# Altium PCB SFCmasterD.PcbDoc (part 2 of 7)
Units mm, origin at the board's own origin, x right, y up, seen from the top; angles counter-clockwise.
Board outline 152.4 x 101.6 mm, 2 copper layers (Top Layer, Bottom Layer); 249 components, 250 nets, 987 pads, 265 vias.
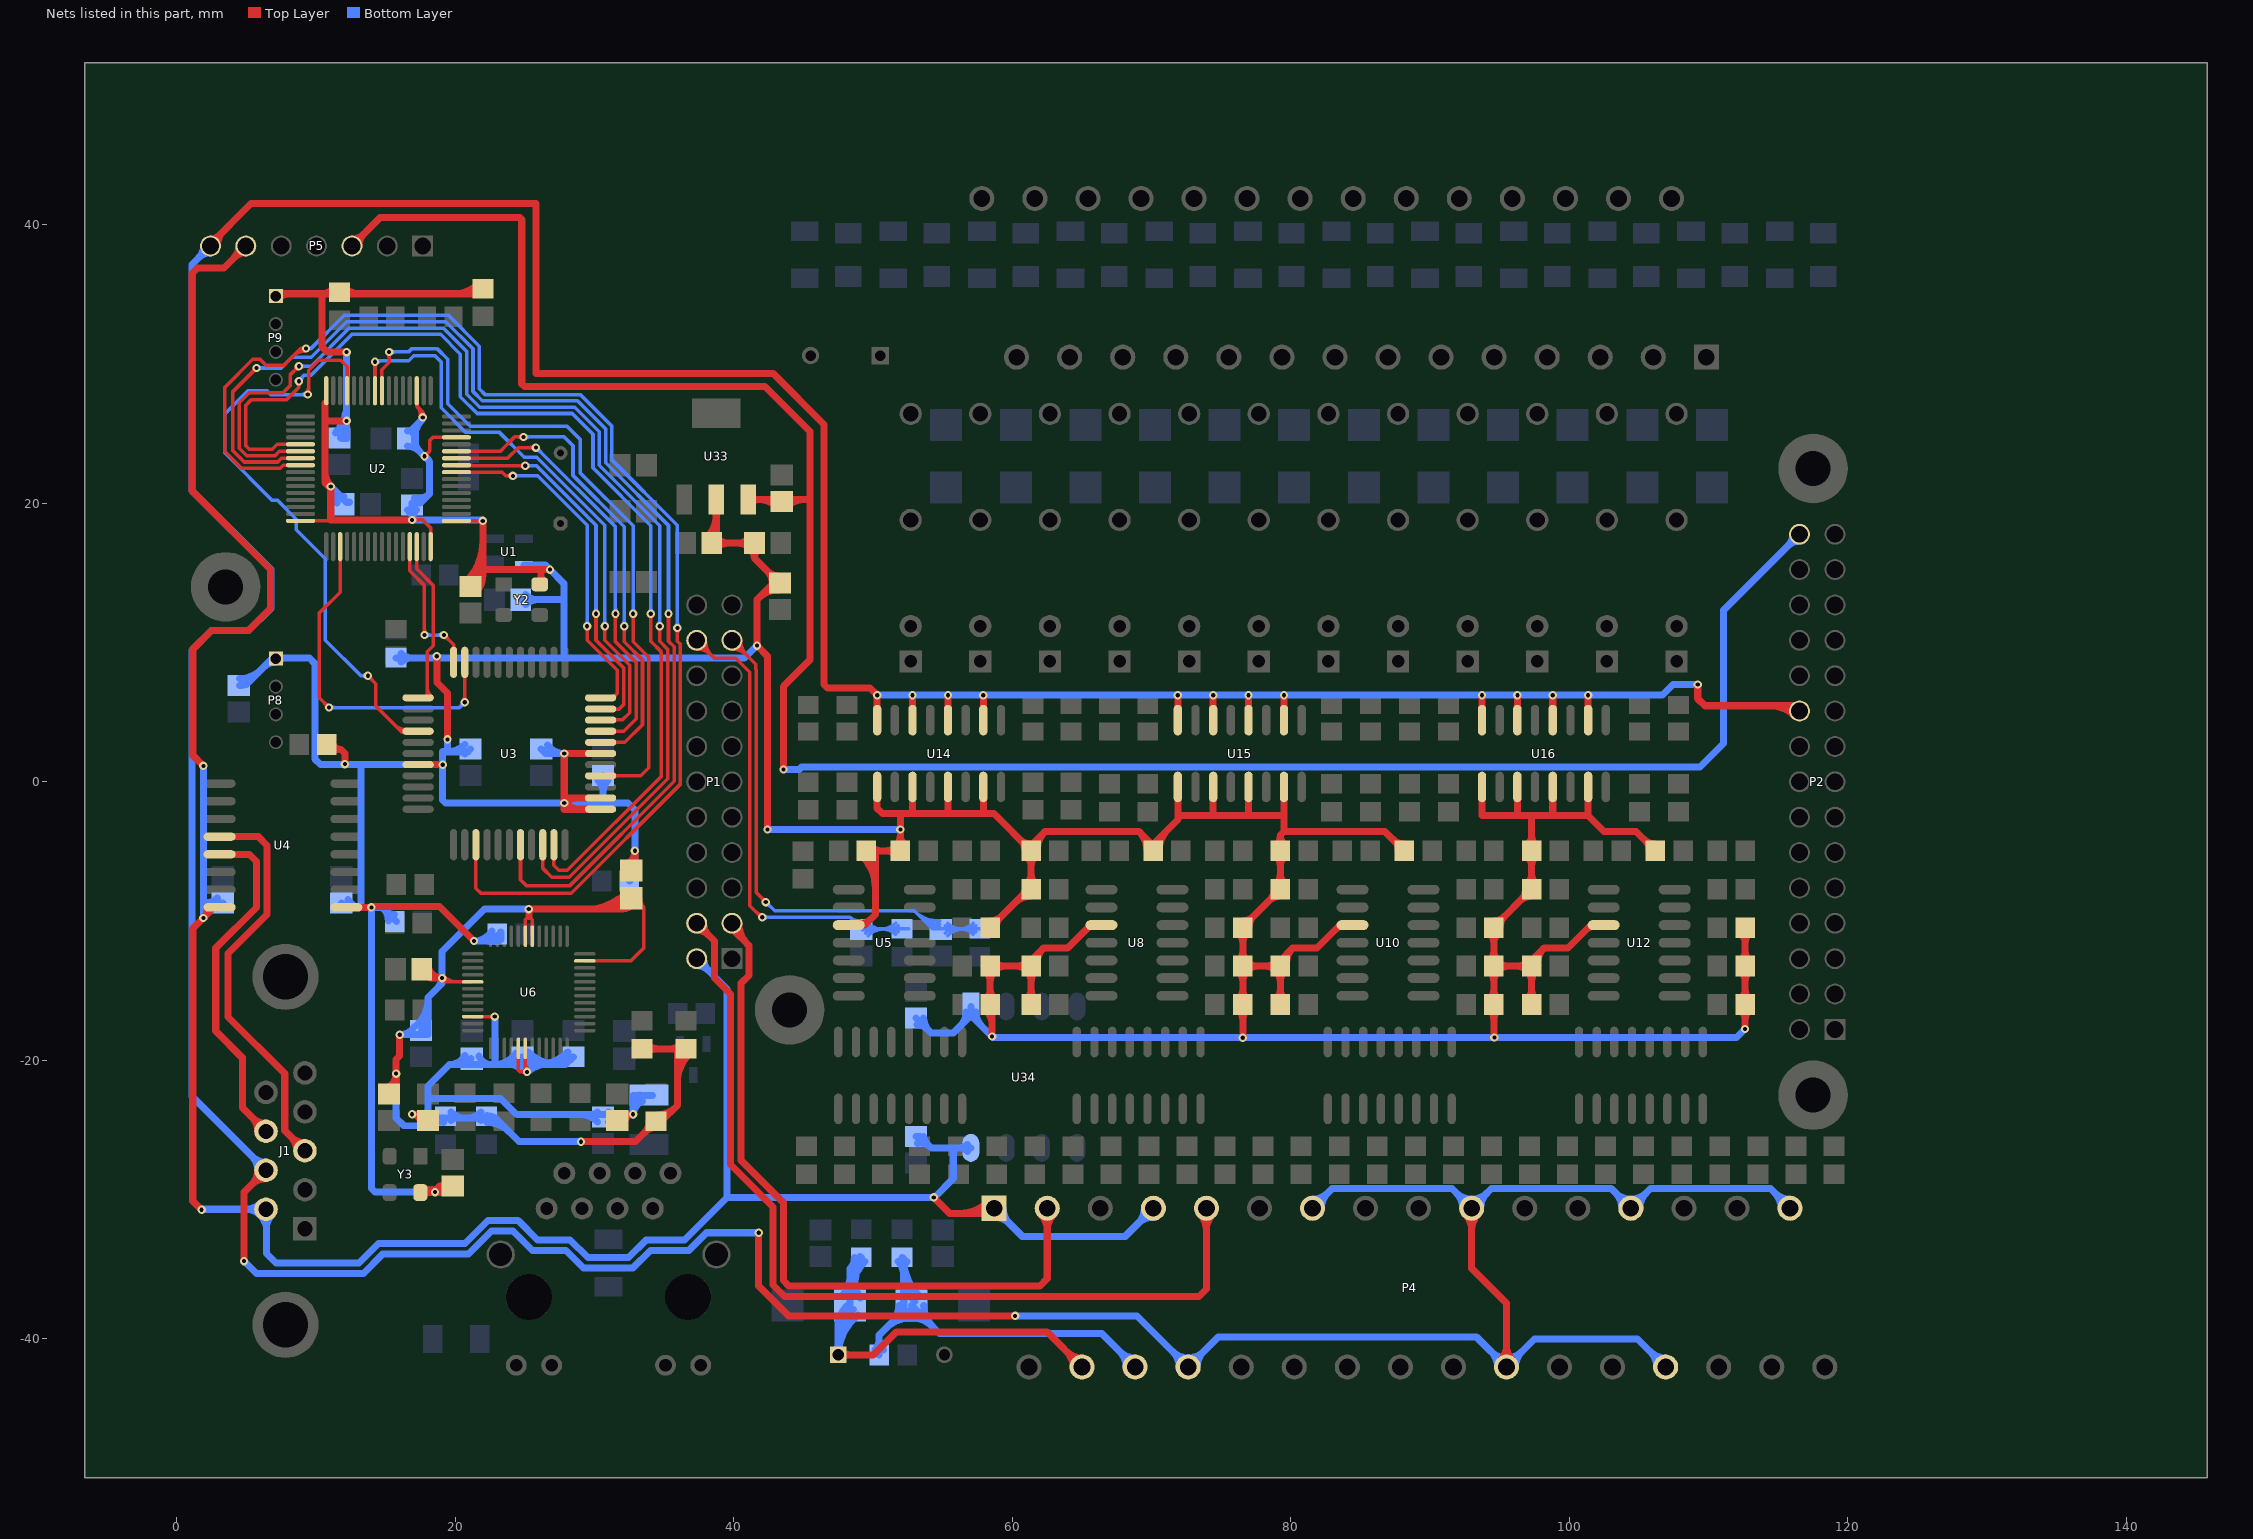
[diagram p2: the nets of this part, all layers, seen from the top]

## Via types
v1: diameter 0.6, hole 0.3, Top Layer to Bottom Layer, 265 vias

## Nets (pads, with @x,y where several pads share a name; then routed paths per layer and width w, separated by ;. In a path a pad name is that pad's centre, name@x,y a point inside that pad or via, vN(x,y) a via of type N, cw(c..) or ccw(c..) an arc to the next point about the centre after c; other vN are vias at no path point) (continued)
3.3V: C1.2 C3.2 C5.2 C6.2 C7.2 C8.2 C9.1 C27.1 C28.1 C31.1 C34.2 C35.1 C36.2 C38.2 C40.1 C42.1 LR2.1 P8.1 P9.1 R1.2 R3.1 R4.1 R6.1 R9.1 R11.1 R12.2 R23.1 R24.2 R28.1 R29.2 R33.1 R34.2 R38.1 R39.2 R43.1 R44.2 R48.1 R49.2 R53.1 R54.2 R70.1 R71.2 R75.1 R76.2 R80.1 R81.2 R85.1 R86.2 R90.1 R91.2 R95.1 R96.2 R101.1 R102.2 R105.1 U1.4 U2.1 U2.13 U2.19 U2.32 U2.48 U2.64 U3.18 U3.34 U3.35 U3.39 U4.1 U5.3 U8.3 U10.3 U12.3 U14.1 U14.3 U14.5 U14.7 U15.1 U15.3 U15.5 U15.7 U16.1 U16.3 U16.5 U16.7 U33.2 U34.1 Y2.4 Y3.4 | length 729.1
  Top Layer w0.254: U2.48@8.878,18.738 10.982,18.738 11.049,18.805 v1@11.049,21.082 ; 10.728,26.806 U2.32@10.728,28.088 U2.32@10.728,27.449 ; v1@10.927,21.087 cw(c10.631,20.791) 11.049,20.791 cw(c11.467,20.791) v1@11.171,21.087 ; v1(16.891,18.805) 17.653,18.805 18.228,18.23 U2.64@18.228,16.888 ; v1@17.013,18.683 cw(c17.309,18.388) 17.309,18.805 cw(c17.309,19.223) v1@17.013,18.928 ; U2.19@17.228,28.088 17.228,26.977 ; U2.19@17.251,27.188 ccw(c17.816,27.188) 17.416,26.789 ; v1@17.482,26.198 ccw(c16.588,26.338) 17.228,26.977 ; v1@17.539,26.302 ccw(c17.32,26.552) 17.653,26.552 ; 17.581,26.624 cw(c17.2,26.242) v1@17.733,26.159 ; v1(17.653,26.171) 17.653,26.552 ; v1@17.767,26.302 cw(c17.986,26.552) 17.653,26.552 ; v1(17.78,23.377) 18.161,23.758 18.161,24.511 18.388,24.738 U2.13@20.078,24.738 ; v1@17.78,23.55 ccw(c17.78,23.968) 18.075,23.673 ccw(c18.371,23.377) v1@17.953,23.377 ; U2.1@20.078,18.738 v1(21.971,18.738) ; v1@21.849,18.616 ccw(c21.553,18.321) 21.553,18.738 ccw(c21.553,19.156) v1@21.849,18.861 ; 17.228,26.977 17.653,26.552
  Top Layer w0.508: P9.1@7.112,34.877 7.287,35.052 10.414,35.052 ; P9.1@7.286,34.703 cw(c8.128,33.861) 8.128,35.052 ; 10.624,22.346 ccw(c12.186,22.346) v1@11.082,21.242 ; U2.32@10.624,27.187 10.624,21.507 v1@11.049,21.082 ; 10.754,21.377 ccw(c11.049,21.673) v1@11.049,21.255 ; R6.1@10.765,2.32 11.777,2.32 ; 10.795,25.917 v1(12.192,25.917) ; 10.825,35.052 cw(c10.825,34.354) R4.1@11.319,34.848 ; v1(11.049,21.209) 11.049,18.805 v1(16.891,18.805) ; R6.1@11.206,2.745 ccw(c11.777,2.916) 11.777,2.32 ; R4.1@11.297,35.455 cw(c10.414,36.22) 10.414,35.052 ; R4.1@12.049,34.848 cw(c12.543,34.354) 12.543,35.052 ; R4.1@12.049,35.478 ccw(c13.079,36.508) 13.079,35.052 ; v1(12.065,1.27) 12.065,2.032 11.777,2.32 ; U4.1@12.17,-9.017 v1(13.97,-9.017) 14.031,-8.956 18.862,-8.956 v1(21.336,-11.43) ; v1(12.192,30.861) 10.795,30.861 10.414,31.242 10.414,35.052 ; U3.18@17.326,1.232 v1(19.088,1.232) ; Y3.4@17.606,-29.181 ccw(c18.068,-28.381) 18.307,-29.273 ; Y3.4@17.657,-29.668 cw(c18.077,-30.088) 18.077,-29.494 cw(c18.077,-28.9) Y3.4@17.657,-29.32 ; Y3.4@17.97,-29.273 cw(c17.97,-30.036) v1@18.509,-29.497 ; Y3.4@17.974,-29.395 cw(c18.116,-30.104) v1@18.517,-29.502 ; v1@18.587,-29.472 cw(c19.245,-29.595) 18.866,-29.043 ; v1(18.669,9.017) 18.669,7.131 19.431,6.369 v1(19.431,3.048) ; v1@18.673,-29.494 ccw(c18.673,-27.974) C40.1@19.771,-29.025 ; C40.1@19.404,-28.674 cw(c17.483,-26.835) Y3.4@17.483,-29.494 19.335,-29.494 C40.1@19.812,-29.017 ; 19.963,35.052 ccw(c19.963,37.375) R3.1@21.606,35.732 ; C9.1@20.781,14.382 ccw(c17.909,17.254) 21.971,17.254 ; C9.1@21.082,14.031 21.971,14.92 ; C9.1@21.132,14.527 ccw(c21.132,15.604) 21.893,14.842 ; C9.1@21.14,14.023 ccw(c19.135,16.028) 21.971,16.028 ; 21.189,35.052 ccw(c21.189,36.149) R3.1@21.965,35.373 ; C9.1@21.5,13.663 ccw(c20.362,14.801) 21.971,14.801 ; C9.1@21.628,14.048 cw(c22.801,14.089) 21.971,14.92 ; 21.971,15.24 26.162,15.24 ; v1(21.971,18.738) 21.971,14.92 ; R3.1@22.336,35.417 21.971,35.052 10.414,35.052 ; Y2.4@25.991,14.355 ccw(c25.578,14.768) 26.162,14.768 ; Y2.4@26.162,14.224 26.162,15.24 ; 26.162,14.782 ccw(c26.766,14.782) Y2.4@26.339,14.355 ; v1(26.797,15.24) 26.162,15.24 ; v1@27.846,-1.557 cw(c28.784,-2.495) 28.784,-1.168 ; v1@27.846,-1.491 ccw(c28.996,-0.341) 28.996,-1.968 ; U3.34@30.426,-1.968 27.813,-1.968 27.821,-1.96 27.821,-1.168 ; U3.35@30.426,-1.168 27.821,-1.168 ; U3.39@30.426,2.032 27.821,2.032 27.821,-1.168 ; LR2.1@32.358,-5.898 ccw(c31.791,-4.953) v1(32.893,-4.953) LR2.1@32.893,-6.627 ; C3.2@38.064,17.546 ccw(c36.445,19.165) 38.735,19.165 ; C3.2@38.423,17.187 ccw(c37.671,17.939) C3.2@38.735,17.939 ; U33.2@38.526,19.534 cw(c38.02,19.028) 38.735,19.028 cw(c39.45,19.028) U33.2@38.944,19.534 ; U33.2@38.735,20.268 38.735,17.465 39.055,17.145 C1.2@41.468,17.145 41.468,16.063 ; C3.2@38.766,16.794 cw(c39.612,15.948) 39.612,17.145 cw(c39.612,18.342) C3.2@38.766,17.496 ; C1.2@41.117,16.794 ccw(c40.271,15.948) 40.271,17.145 ccw(c40.271,18.342) C1.2@41.117,17.496 ; C1.2@41.158,16.708 cw(c40.642,16.063) 41.468,16.063 ; 41.733,13.158 cw(c43.257,11.633) C36.2@43.257,13.789 ; C1.2@41.778,16.708 ccw(c42.294,16.063) 41.468,16.063 ; 42.392,15.139 ccw(c43.257,16.005) C36.2@43.257,14.781 ; v1(42.418,-3.429) 42.418,9.017 v1(41.656,9.779) 41.656,13.081 42.86,14.285 C36.2@43.053,14.285 ; 42.418,15.113 cw(c41.59,14.285) C36.2@42.761,14.285 ; C36.2@43.307,14.285 C36.2@43.053,14.285 ; U5.3@48.25,-10.287 49.403,-10.287 50.165,-9.525 50.165,-4.953 R9.1@49.514,-4.953 R12.2@51.959,-4.953 v1(51.959,-3.429) 51.959,-2.397 52.07,-2.286 ; U5.3@49.05,-10.191 ccw(c49.05,-9.107) 49.816,-9.874 ; R9.1@49.199,-5.318 cw(c46.866,-7.651) 50.165,-7.651 ; R9.1@49.558,-4.959 cw(c48.092,-6.425) 50.165,-6.425 ; R9.1@49.829,-5.268 cw(c50.591,-6.03) 50.591,-4.953 cw(c50.591,-3.876) R9.1@49.829,-4.638 ; U14.1@50.292,-0.368 50.292,-1.905 50.673,-2.286 52.07,-2.286 ; R12.2@51.644,-5.268 ccw(c50.882,-6.03) 50.882,-4.953 ccw(c50.882,-3.876) R12.2@51.644,-4.638 ; R12.2@51.644,-4.588 ccw(c50.882,-3.826) 51.959,-3.826 ccw(c53.036,-3.826) R12.2@52.274,-4.588 ; 52.832,-2.159 U14.3@52.832,-0.368 ; U14.5@55.372,-0.368 55.372,-2.159 55.499,-2.286 ; 57.912,-2.286 U14.7@57.912,-0.368 ; R11.1@58.089,-16.367 cw(c56.982,-17.474) 58.547,-17.474 ; R11.1@58.089,-15.637 ccw(c57.327,-14.875) 58.404,-14.875 ccw(c59.481,-14.875) R11.1@58.719,-15.637 ; R23.1@58.089,-13.605 cw(c57.327,-14.366) 58.404,-14.366 cw(c59.481,-14.366) R23.1@58.719,-13.605 ; R24.2@58.404,-10.477 61.166,-7.715 R34.2@61.341,-7.715 R29.2@61.341,-4.953 ; R24.2@58.404,-9.982 ccw(c58.404,-8.784) 59.251,-9.631 ; v1(58.547,-18.288) 58.547,-16.145 R11.1@58.404,-16.002 R23.1@58.404,-13.24 R33.1@61.341,-13.24 ; 58.547,-16.784 cw(c59.136,-16.784) R11.1@58.719,-16.367 ; R23.1@58.719,-13.555 cw(c59.481,-14.316) 59.481,-13.24 cw(c59.481,-12.163) R23.1@58.719,-12.924 ; R24.2@58.85,-10.428 cw(c59.806,-10.428) 59.13,-9.751 ; 60.196,-8.686 cw(c61.341,-9.831) R34.2@61.341,-8.211 ; 60.494,-4.106 ccw(c61.341,-3.26) R29.2@61.341,-4.457 ; 60.615,-4.227 cw(c59.939,-4.903) R29.2@60.895,-4.903 ; R34.2@60.739,-8.143 ccw(c60.361,-7.765) R34.2@60.895,-7.765 ; R28.1@61.026,-15.637 ccw(c60.264,-14.875) 61.341,-14.875 ccw(c62.418,-14.875) R28.1@61.656,-15.637 ; R33.1@61.026,-13.605 cw(c60.264,-14.366) 61.341,-14.366 cw(c62.418,-14.366) R33.1@61.656,-13.605 ; R33.1@61.026,-13.555 ccw(c60.264,-14.316) 60.264,-13.24 ccw(c60.264,-12.163) R33.1@61.026,-12.924 ; R34.2@61.026,-7.35 ccw(c60.264,-6.589) 61.341,-6.589 ccw(c62.418,-6.589) R34.2@61.656,-7.35 ; R29.2@61.026,-5.318 cw(c60.264,-6.08) 61.341,-6.08 cw(c62.418,-6.08) R29.2@61.656,-5.318 ; R28.1@61.341,-16.002 R33.1@61.341,-13.24 ; R33.1@61.785,-13.152 cw(c63.316,-13.024) 62.23,-11.938 ; R29.2@61.787,-4.903 cw(c63.663,-4.903) 62.336,-3.577 ; U8.3@66.395,-10.287 65.624,-10.287 63.973,-11.938 62.23,-11.938 ; 69.109,-3.577 cw(c67.782,-4.903) R39.2@69.658,-4.903 ; R39.2@70.55,-4.903 cw(c72.611,-4.903) 71.154,-3.446 ; U15.1@71.882,-0.368 71.882,-2.413 ; U15.3@74.422,-0.368 74.422,-2.413 ; R38.1@76.234,-16.367 cw(c75.472,-17.129) 76.549,-17.129 cw(c77.626,-17.129) R38.1@76.864,-16.367 ; R38.1@76.234,-15.637 ccw(c75.472,-14.875) 76.549,-14.875 ccw(c77.626,-14.875) R38.1@76.864,-15.637 ; R43.1@76.234,-13.605 cw(c75.472,-14.366) 76.549,-14.366 cw(c77.626,-14.366) R43.1@76.864,-13.605 ; R43.1@76.234,-12.874 ccw(c75.472,-12.113) 76.549,-12.113 ccw(c77.626,-12.113) R43.1@76.864,-12.874 ; R44.2@76.234,-10.843 cw(c75.472,-11.604) 76.549,-11.604 cw(c77.626,-11.604) R44.2@76.864,-10.843 ; v1(76.549,-18.383) R38.1@76.549,-16.002 R43.1@76.549,-13.24 ; R44.2@76.549,-9.982 ccw(c76.549,-8.937) 77.288,-9.676 ; R43.1@76.864,-13.555 cw(c77.626,-14.316) 77.626,-13.24 cw(c77.626,-12.163) R43.1@76.864,-12.924 ; U15.5@76.962,-0.368 76.962,-2.413 ; R44.2@76.995,-10.428 cw(c78.104,-10.428) 77.32,-9.644 ; 78.401,-8.562 cw(c79.248,-9.409) R54.2@79.248,-8.211 ; 78.522,-8.441 ccw(c77.846,-7.765) R54.2@78.802,-7.765 ; R48.1@78.933,-15.637 ccw(c78.171,-14.875) 79.248,-14.875 ccw(c80.325,-14.875) R48.1@79.563,-15.637 ; R53.1@78.933,-13.605 cw(c78.171,-14.366) 79.248,-14.366 cw(c80.325,-14.366) R53.1@79.563,-13.605 ; R53.1@78.933,-13.555 ccw(c78.171,-14.316) 78.171,-13.24 ccw(c78.171,-12.163) R53.1@78.933,-12.924 ; R54.2@78.933,-7.35 ccw(c78.171,-6.589) 79.248,-6.589 ccw(c80.325,-6.589) R54.2@79.563,-7.35 ; R49.2@78.933,-5.318 cw(c78.171,-6.08) 79.248,-6.08 cw(c80.325,-6.08) R49.2@79.563,-5.318 ; R49.2@78.933,-4.588 ccw(c78.171,-3.826) 79.248,-3.826 ccw(c80.325,-3.826) R49.2@79.563,-4.588 ; R48.1@79.248,-16.002 R53.1@79.248,-13.24 ; U15.7@79.502,-0.368 79.502,-2.413 ; R53.1@79.692,-13.152 cw(c81.223,-13.024) 80.137,-11.938 ; 83.297,-10.52 cw(c83.629,-10.852) U10.3@83.629,-10.383 ; U10.3@84.429,-10.287 83.531,-10.287 81.88,-11.938 80.137,-11.938 ; 87.291,-4.106 ccw(c88.138,-3.26) R71.2@88.138,-4.457 ; 87.412,-4.227 cw(c86.736,-4.903) R71.2@87.692,-4.903 ; R71.2@88.138,-4.953 86.741,-3.556 79.502,-3.556 ; U16.1@93.726,-0.368 93.726,-2.413 96.266,-2.413 ; R70.1@94.268,-16.367 cw(c93.506,-17.129) 94.583,-17.129 cw(c95.66,-17.129) R70.1@94.898,-16.367 ; R70.1@94.268,-15.637 ccw(c93.506,-14.875) 94.583,-14.875 ccw(c95.66,-14.875) R70.1@94.898,-15.637 ; R75.1@94.268,-13.605 cw(c93.506,-14.366) 94.583,-14.366 cw(c95.66,-14.366) R75.1@94.898,-13.605 ; R75.1@94.268,-12.874 ccw(c93.506,-12.113) 94.583,-12.113 ccw(c95.66,-12.113) R75.1@94.898,-12.874 ; R76.2@94.268,-10.843 cw(c93.506,-11.604) 94.583,-11.604 cw(c95.66,-11.604) R76.2@94.898,-10.843 ; R76.2@94.583,-9.982 ccw(c94.583,-8.937) 95.322,-9.676 ; v1(94.615,-18.361) 94.605,-18.361 94.583,-18.383 R70.1@94.583,-16.002 R75.1@94.583,-13.24 ; R75.1@94.898,-13.555 cw(c95.66,-14.316) 95.66,-13.24 cw(c95.66,-12.163) R75.1@94.898,-12.924 ; R76.2@95.029,-10.428 cw(c96.138,-10.428) 95.354,-9.644 ; U16.3@96.266,-0.368 96.266,-2.413 ; 96.435,-8.562 cw(c97.282,-9.409) R86.2@97.282,-8.211 ; 96.556,-8.441 ccw(c95.88,-7.765) R86.2@96.836,-7.765 ; R80.1@96.967,-15.637 ccw(c96.205,-14.875) 97.282,-14.875 ccw(c98.359,-14.875) R80.1@97.597,-15.637 ; R85.1@96.967,-13.605 cw(c96.205,-14.366) 97.282,-14.366 cw(c98.359,-14.366) R85.1@97.597,-13.605 ; R85.1@96.967,-13.555 ccw(c96.205,-14.316) 96.205,-13.24 ccw(c96.205,-12.163) R85.1@96.967,-12.924 ; R86.2@96.967,-7.35 ccw(c96.205,-6.589) 97.282,-6.589 ccw(c98.359,-6.589) R86.2@97.597,-7.35 ; R81.2@96.967,-5.318 cw(c96.205,-6.08) 97.282,-6.08 cw(c98.359,-6.08) R81.2@97.597,-5.318 ; R81.2@96.967,-4.588 ccw(c96.205,-3.826) 97.282,-3.826 ccw(c98.359,-3.826) R81.2@97.597,-4.588 ; R80.1@97.282,-16.002 R85.1@97.282,-13.24 ; R85.1@97.726,-13.152 cw(c99.257,-13.024) 98.171,-11.938 ; U16.5@98.806,-0.368 98.806,-2.413 ; 101.331,-10.52 cw(c101.663,-10.852) U12.3@101.663,-10.383 ; U16.7@101.346,-0.368 101.346,-2.413 ; U12.3@102.463,-10.287 101.565,-10.287 99.914,-11.938 98.171,-11.938 ; 105.325,-4.106 ccw(c106.172,-3.26) R91.2@106.172,-4.457 ; 105.446,-4.227 cw(c104.77,-4.903) R91.2@105.726,-4.903 ; R91.2@106.172,-4.953 104.775,-3.556 102.489,-3.556 101.346,-2.413 ; R90.1@112.302,-16.367 cw(c111.54,-17.129) 112.617,-17.129 cw(c113.694,-17.129) R90.1@112.932,-16.367 ; R90.1@112.302,-15.637 ccw(c111.54,-14.875) 112.617,-14.875 ccw(c113.694,-14.875) R90.1@112.932,-15.637 ; R95.1@112.302,-13.605 cw(c111.54,-14.366) 112.617,-14.366 cw(c113.694,-14.366) R95.1@112.932,-13.605 ; R95.1@112.302,-12.874 ccw(c111.54,-12.113) 112.617,-12.113 ccw(c113.694,-12.113) R95.1@112.932,-12.874 ; R96.2@112.302,-10.843 cw(c111.54,-11.604) 112.617,-11.604 cw(c113.694,-11.604) R96.2@112.932,-10.843 ; v1(112.617,-17.748) R90.1@112.617,-16.002 R95.1@112.617,-13.24 R96.2@112.617,-10.477 ; 41.468,16.063 43.053,14.478 C36.2@43.053,14.285 ; 52.07,-2.286 55.499,-2.286 ; 55.499,-2.286 58.674,-2.286 R29.2@61.341,-4.953 ; R33.1@61.341,-13.24 61.341,-12.827 62.23,-11.938 ; R29.2@61.341,-4.953 61.341,-4.572 62.357,-3.556 69.088,-3.556 70.104,-4.572 R39.2@70.104,-4.953 70.104,-4.495 71.882,-2.717 71.882,-2.413 ; 71.882,-2.413 74.422,-2.413 ; 74.422,-2.413 76.962,-2.413 ; R43.1@76.549,-13.24 R53.1@79.248,-13.24 ; R43.1@76.549,-13.24 R44.2@76.549,-10.477 76.549,-10.414 R54.2@79.248,-7.715 R49.2@79.248,-4.953 79.248,-3.81 79.502,-3.556 ; 76.962,-2.413 79.502,-2.413 ; R53.1@79.248,-13.24 79.248,-12.827 80.137,-11.938 ; 79.502,-3.556 79.502,-2.413 ; R75.1@94.583,-13.24 R85.1@97.282,-13.24 ; R75.1@94.583,-13.24 R76.2@94.583,-10.477 94.583,-10.414 R86.2@97.282,-7.715 R81.2@97.282,-4.953 97.282,-2.54 97.409,-2.413 ; 96.266,-2.413 97.409,-2.413 ; R85.1@97.282,-13.24 97.282,-12.827 98.171,-11.938 ; 97.409,-2.413 98.806,-2.413 ; 98.806,-2.413 101.346,-2.413
  Bottom Layer w0.508: C6.2@4.495,6.907 ccw(c4.495,7.897) C6.2@5.195,7.197 ; C6.2@4.495,7.415 ccw(c4.495,9.631) 6.062,8.064 ; C6.2@4.699,6.985 4.983,6.985 P8.1@6.84,8.842 ; 6.228,8.23 cw(c7.112,7.345) P8.1@7.112,8.596 ; P8.1@7.286,8.668 cw(c7.822,8.132) 7.822,8.89 ; P8.1@7.559,8.89 9.525,8.89 9.906,8.509 9.906,1.651 10.325,1.232 13.208,1.232 ; C7.2@11.383,25.05 ccw(c9.431,27.002) 12.192,27.002 ; C38.2@11.509,20.014 ccw(c9.935,20.094) v1(11.049,21.209) 12.183,20.075 C38.2@12.395,20.075 ; C38.2@11.61,20.648 ccw(c12.004,21.043) C38.2@12.004,20.485 ; 11.702,25.534 cw(c12.36,25.101) v1@12.201,25.872 ; C7.2@11.742,24.691 ccw(c10.657,25.776) v1@12.192,25.776 ; C42.1@11.811,-8.697 12.131,-9.017 13.208,-9.017 ; C7.2@11.836,24.672 12.228,24.672 12.192,24.708 v1(12.192,30.861) ; 12.095,26.498 ccw(c12.771,26.369) v1@12.228,25.946 ; C42.1@12.301,-8.467 ccw(c13.208,-7.993) 13.208,-9.017 ; 14.821,-9.09 cw(c13.928,-9.983) R105.1@15.191,-9.983 ; 15.007,-9.276 ccw(c15.637,-8.646) R105.1@15.637,-9.537 ; R1.2@15.748,8.89 27.813,8.89 ; R105.1@15.764,-10.033 14.748,-9.017 v1(13.97,-9.017) ; R1.2@16.113,8.591 cw(c16.836,7.868) 16.836,8.89 ; R1.2@16.113,9.221 ccw(c16.913,10.021) 16.913,8.89 ; C34.2@16.567,19.512 cw(c15.959,18.805) v1(16.891,18.805) ; C5.2@16.571,24.101 cw(c16.571,22.931) 17.399,23.758 ; C5.2@17.025,24.897 cw(c17.552,25.129) 17.145,25.536 ; C34.2@17.052,20.371 ccw(c17.315,21.515) 18.145,20.685 ; C5.2@17.067,24.597 ccw(c18.291,24.597) 17.425,23.732 ; C5.2@17.067,24.697 cw(c18.904,24.697) v1@17.605,25.997 ; C34.2@17.215,19.512 ccw(c17.823,18.805) v1(16.891,18.805) ; 17.485,25.876 ccw(c17.189,26.171) v1@17.607,26.171 ; v1@17.653,26.044 17.145,25.536 ; v1@17.77,23.333 cw(c17.661,22.861) 18.145,22.861 ; 18.251,8.89 ccw(c18.251,9.435) v1@18.636,9.05 ; v1(18.542,-29.464) 14.224,-29.464 13.97,-29.21 v1(13.97,-9.017) ; v1@18.702,9.05 ccw(c19.087,9.435) 19.087,8.89 ; 19.088,-0.381 v1(19.088,1.232) ; v1(19.431,3.048) 19.431,2.159 ; C35.1@20.288,2.159 cw(c20.288,1.603) C35.1@20.681,1.996 ; C35.1@20.674,2.69 cw(c19.431,3.878) 19.431,2.159 ; C35.1@21.082,2.347 20.894,2.159 19.431,2.159 ; v1(21.971,18.738) v1@21.971,18.796 ; v1@21.98,18.805 v1(16.891,18.805) ; 22.273,-11.43 ccw(c22.273,-10.497) R102.2@23.055,-11.006 ; R102.2@22.629,-10.729 cw(c21.336,-9.887) v1(21.336,-11.43) 23.13,-11.43 23.257,-11.303 R102.2@23.257,-10.795 ; C8.2@24.699,13.081 27.813,13.081 ; U1.4@24.926,15.56 26.477,15.56 v1(26.797,15.24) 27.813,14.224 27.813,8.89 ; C8.2@25.05,12.73 cw(c25.896,11.884) 25.896,13.081 cw(c25.896,14.278) C8.2@25.05,13.432 ; 25.913,15.56 cw(c25.913,14.356) v1@26.764,15.207 ; C31.1@26.162,2.347 26.477,2.032 v1(27.813,2.032) cw(c27.813,3.522) C31.1@26.612,2.64 ; C27.1@30.256,0.096 cw(c29.41,-0.75) 30.607,-0.75 cw(c31.804,-0.75) C27.1@30.958,0.096 ; C27.1@30.607,0.447 30.607,-1.524 v1(27.813,-1.524) ; R101.1@32.181,-6.747 ccw(c30.461,-5.027) v1@32.893,-5.027 ; R101.1@32.54,-7.106 ccw(c31.687,-6.253) 32.893,-6.253 ; R101.1@32.877,-6.731 R101.1@32.496,-7.112 32.893,-6.715 32.893,-2.032 32.385,-1.524 v1(27.813,-1.524) ; v1(41.656,9.779) 40.767,8.89 27.813,8.89 ; v1(42.418,-3.429) v1(51.959,-3.429) ; C28.1@53.086,-16.952 54.168,-18.034 55.753,-18.034 U34.1@57.023,-16.764 ; C28.1@53.136,-17.448 cw(c53.136,-18.525) 53.897,-17.763 ; C28.1@53.632,-16.952 ccw(c54.95,-16.952) 54.018,-17.884 ; 56.266,-17.521 ccw(c55.274,-16.529) U34.1@56.677,-16.529 ; U34.1@57.023,-16.129 U34.1@57.023,-16.764 ; U34.1@57.369,-16.529 ccw(c58.772,-16.529) 57.78,-17.521 ; v1(112.617,-17.748) 112.004,-18.361 v1(94.615,-18.361) 58.62,-18.361 v1(58.547,-18.288) U34.1@57.023,-16.764 ; 13.208,-9.017 v1(13.97,-9.017) ; 13.208,-9.017 13.208,1.232 ; 13.208,1.232 v1(19.088,1.232) ; v1(16.891,18.805) 16.891,20.014 17.474,20.014 18.145,20.685 ; 17.145,25.536 17.145,24.012 18.145,23.012 18.145,20.685 ; v1(19.088,1.232) 19.088,2.159 19.431,2.159 ; v1(19.088,1.232) 19.088,-1.308 19.304,-1.524 v1(27.813,-1.524) ; C5.2@16.571,25.193 ccw(c16.571,25.751) 16.965,25.357 cw(c16.571,25.751) C5.2@16.571,25.193
3.3VPHY: C15.1 C16.1 C18.1 LR2.2 R16.1 R19.1 R20.1 R21.1 R100.1 U6.23 U6.30 U6.31 U6.41 | length 118.2
  Top Layer w0.25: 25.273,-9.664 25.523,-9.914 U6.30@25.523,-11.088
  Top Layer w0.254: C15.1@17.587,-13.335 18.349,-14.097 ; C15.1@17.911,-14.044 cw(c18.096,-14.35) 18.349,-14.097 ; C15.1@18.2,-13.622 ccw(c18.729,-13.717) 18.349,-14.097 ; v1@18.993,-14.154 ccw(c19.497,-13.65) 19.497,-14.363 ; v1(19.05,-14.097) 19.316,-14.363 ; v1@19.063,-14.269 cw(c19.088,-14.591) 19.316,-14.363 ; v1@19.172,-13.975 ccw(c20.11,-13.037) 20.11,-14.363 ; v1@19.222,-14.11 ccw(c19.544,-14.135) 19.316,-14.363 ; U6.41@21.248,-14.363 19.316,-14.363 ; U6.31@25.023,-11.088 25.023,-9.914 25.273,-9.664 ; U6.23@29.298,-12.863 32.603,-12.863 33.528,-11.938 33.528,-9.001 ; LR2.2@32.711,-8.183 33.528,-9.001 ; LR2.2@32.993,-8.939 cw(c33.221,-9.308) 33.528,-9.001 ; LR2.2@33.31,-8.415 ccw(c34.059,-8.47) 33.528,-9.001
  Top Layer w0.5: C18.1@15.09,-21.96 ccw(c14.652,-20.955) v1(15.748,-20.955) ; C18.1@15.113,-22.86 15.748,-22.225 v1(15.748,-20.955) ; C18.1@15.29,-22.418 ccw(c14.985,-21.719) C18.1@15.748,-21.719 ; v1(16.002,-18.161) 16.002,-19.685 15.748,-19.939 v1(15.748,-20.955) ; 25.273,-9.664 v1(25.273,-9.144) 31.75,-9.144 ; v1(29.019,-25.845) 32.941,-25.845 R16.1@34.417,-24.368 34.814,-24.368 35.941,-23.241 R19.1@35.941,-19.304 ; 29.433,-9.144 ccw(c29.433,-5.16) LR2.2@32.25,-7.977 ; 30.64,-9.144 ccw(c30.64,-6.367) LR2.2@32.604,-8.331 ; 31.779,-9.115 ccw(c31.029,-8.366) LR2.2@32.089,-8.366 ; LR2.2@31.847,-9.144 ccw(c31.847,-7.574) LR2.2@32.957,-8.684 ; LR2.2@32.533,-8.906 ccw(c32.365,-9.759) 31.75,-9.144 ; LR2.2@32.711,-8.183 31.75,-9.144 ; 33.563,-25.222 ccw(c32.71,-24.368) R16.1@33.917,-24.368 ; R100.1@33.655,-19.177 36.846,-19.177 R19.1@36.957,-19.288 ; 33.684,-25.101 cw(c34.367,-25.784) R16.1@34.367,-24.818 ; R100.1@33.769,-19.479 cw(c34.499,-20.209) 34.499,-19.177 ; R100.1@33.769,-18.843 ccw(c34.576,-18.036) 34.576,-19.177 ; R16.1@34.467,-23.918 ccw(c34.467,-21.994) 35.828,-23.354 ; 35.401,-19.177 ccw(c35.401,-18.036) R19.1@36.208,-18.843 ; 35.478,-19.177 cw(c35.478,-20.209) R19.1@36.208,-19.479 ; 35.941,-21.66 cw(c39.025,-21.66) R19.1@36.844,-19.479 ; 35.941,-20.453 cw(c37.818,-20.453) R19.1@36.491,-19.126
  Top Layer w0.508: C15.1@17.576,-13.516 ccw(c18.362,-13.274) 18.362,-14.097 ; C15.1@18.061,-13.366 ccw(c19.05,-13.063) v1(19.05,-14.097) 18.349,-14.097
  Bottom Layer w0.5: v1(15.748,-20.955) 15.748,-24.13 16.318,-24.7 18.226,-24.7 ; C16.1@17.053,-17.58 cw(c16.002,-16.921) v1(16.002,-18.161) 18.034,-18.161 18.034,-15.494 19.05,-14.478 v1(19.05,-14.097) 19.05,-12.192 22.098,-9.144 v1(25.273,-9.144) ; C16.1@17.222,-17.492 ccw(c15.263,-15.533) 18.034,-15.533 ; C16.1@17.576,-17.846 ccw(c16.47,-16.74) 18.034,-16.74 ; 18.695,-14.833 ccw(c17.959,-14.097) v1@19,-14.097 ; R20.1@19.139,-24.454 ccw(c18.896,-25.37) 18.226,-24.7 ; R20.1@19.672,-24.337 cw(c20.134,-24.799) 20.134,-24.146 ; R20.1@19.672,-23.701 ccw(c20.747,-22.626) 20.747,-24.146 ; 20.782,-24.146 ccw(c20.782,-22.626) R21.1@21.857,-23.701 ; 21.395,-24.146 cw(c21.395,-24.799) R21.1@21.857,-24.337 ; R21.1@22.275,-24.469 cw(c22.275,-26.7) 23.852,-25.122 ; R21.1@22.275,-23.969 cw(c22.275,-24.993) 22.999,-24.269 ; v1(29.019,-25.845) 24.575,-25.845 22.876,-24.146 18.78,-24.146 18.226,-24.7
5V: C4.1 P2.30 P5.3 U33.3 | length 171
  Top Layer w0.508: P5.3@12.573,38.481 14.605,40.513 24.638,40.513 24.765,40.386 24.765,28.575 24.954,28.386 42.226,28.386 45.466,25.146 45.466,8.763 43.561,6.858 v1(43.561,0.889) ; P5.3@12.573,38.977 ccw(c12.573,40.174) 13.42,39.328 ccw(c14.266,38.481) P5.3@13.069,38.481 ; U33.3@41.035,20.268 41.035,20.334 40.96,20.259 45.466,20.259 ; U33.3@41.244,20.059 cw(c41.728,19.575) 41.728,20.259 ; U33.3@41.244,20.477 ccw(c41.771,21.004) 41.771,20.259 ; 41.88,20.259 cw(c41.88,18.628) C4.1@43.033,19.781 ; 42.493,20.259 ccw(c42.493,21.023) C4.1@43.033,20.483 ; C4.1@43.835,19.781 cw(c44.988,18.628) 44.988,20.259 ; C4.1@43.835,20.483 ccw(c44.375,21.023) 44.375,20.259
  Bottom Layer w0.508: v1(43.561,0.889) 44.704,0.889 44.875,1.06 109.391,1.06 111.071,2.74 111.071,12.321 P2.30@116.53,17.78 ; P2.30@116.034,17.78 cw(c114.837,17.78) 115.683,16.933 cw(c116.53,16.087) P2.30@116.53,17.284
5VA: C26.1 C41.1 J1.6 P1.2 P4.1 P4.7 P5.6 U4.16 U34.8 | length 208.7
  Top Layer w0.508: v1(1.778,-30.734) 1.143,-30.099 1.143,-10.541 v1(1.905,-9.779) ; v1(1.905,1.143) 1.143,1.905 1.143,9.525 2.486,10.868 5.153,10.868 6.731,12.446 6.731,15.255 1.081,20.905 1.081,36.514 1.47,36.903 3.375,36.903 P5.6@4.953,38.481 ; U4.16@2.174,-9.022 cw(c1.243,-9.117) v1(1.905,-9.779) ; U4.16@2.661,-9.023 ccw(c2.614,-8.977) U4.16@2.68,-8.97 ; U4.16@3.07,-9.017 2.667,-9.017 v1(1.905,-9.779) ; P5.6@4.457,38.481 cw(c3.26,38.481) 4.106,37.634 cw(c4.953,36.788) P5.6@4.953,37.985 ; v1(54.356,-29.845) 55.499,-30.988 58.328,-30.988 P4.1@58.694,-30.622 P4.1@58.694,-30.627 ; 56.251,-30.988 ccw(c56.251,-28.179) P4.1@58.237,-30.165 ; 57.477,-30.988 ccw(c57.477,-29.405) P4.1@58.596,-30.524
  Bottom Layer w0.508: v1@1.778,-30.697 6.44,-30.697 6.44,-33.872 7.112,-34.544 13.081,-34.544 14.478,-33.147 20.701,-33.147 22.352,-31.496 24.511,-31.496 25.908,-32.893 28.243,-32.893 29.513,-34.163 32.437,-34.163 33.707,-32.893 36.449,-32.893 39.497,-29.845 ; v1(1.905,-9.779) v1(1.905,1.143) ; 1.966,-8.697 C41.1@3.302,-8.697 ; C41.1@2.901,-9.048 ccw(c2.055,-9.894) 2.055,-8.697 ccw(c2.055,-7.5) C41.1@2.901,-8.346 ; J1.6@5.983,-30.279 cw(c4.974,-29.27) 4.974,-30.697 cw(c4.974,-32.124) 5.983,-31.115 cw(c4.88,-32.218) 6.44,-32.218 ; 6.44,-32.03 cw(c7.734,-32.03) J1.6@6.819,-31.115 ; P1.2@37.33,-13.196 cw(c37.33,-14.393) 38.177,-13.547 cw(c39.023,-12.7) P1.2@37.826,-12.7 ; P1.2@37.33,-12.7 39.497,-14.867 39.497,-29.845 ; C26.1@53.086,-25.466 53.378,-25.466 54.201,-26.289 ; C26.1@53.206,-25.957 cw(c53.371,-27.119) 54.201,-26.289 ; C26.1@53.632,-25.466 ccw(c54.245,-25.466) C26.1@53.812,-25.9 ; 55.88,-26.289 U34.8@57.023,-26.289 ; U34.8@56.778,-26.534 ccw(c56.188,-27.124) 56.188,-26.289 ccw(c56.188,-25.454) U34.8@56.778,-26.044 ; P4.1@58.694,-31.268 cw(c58.694,-32.828) 59.797,-31.725 cw(c60.9,-30.622) P4.1@59.34,-30.622 ; P4.1@58.694,-30.622 60.711,-32.639 68.107,-32.639 P4.7@70.124,-30.622 ; P4.7@69.478,-30.622 cw(c67.918,-30.622) 69.021,-31.725 cw(c70.124,-32.828) P4.7@70.124,-31.268 ; 39.497,-29.845 v1(54.356,-29.845) 54.406,-29.845 55.753,-28.498 55.753,-26.289 54.201,-26.289
24V: J1.7 P2.20 P4.8 P4.13 P4.19 P4.20 P4.25 P4.26 P4.31 P5.7 U14.10 U14.12 U14.14 U14.16 U15.10 U15.12 U15.14 U15.16 U16.10 U16.12 U16.14 U16.16 | length 462.6
  Top Layer w0.508: P5.7@2.413,38.608 5.334,41.529 25.781,41.529 25.781,29.337 42.799,29.337 46.482,25.654 46.482,6.985 46.736,6.731 49.784,6.731 v1(50.292,6.223) U14.16@50.292,4.432 ; P5.7@2.413,38.977 ccw(c2.413,39.868) 3.043,39.238 ; P5.7@2.909,38.481 cw(c4.413,38.481) 3.35,39.545 ; v1(4.826,-34.417) 4.826,-29.474 J1.7@6.401,-27.899 ; J1.7@5.81,-27.899 cw(c4.383,-27.899) 5.392,-28.908 cw(c6.401,-29.917) J1.7@6.401,-28.49 ; v1(41.783,-32.385) 41.783,-36.195 43.942,-38.354 v1(60.198,-38.354) ; U14.14@52.832,4.432 v1(52.832,6.223) ; U14.12@55.372,4.432 v1(55.372,6.223) ; U14.10@57.912,4.432 v1(57.912,6.223) ; U15.16@71.882,4.432 v1(71.882,6.223) ; U15.14@74.422,4.432 v1(74.422,6.223) ; U15.12@76.962,4.432 v1(76.962,6.223) ; U15.10@79.502,4.432 v1(79.502,6.223) ; P4.19@92.527,-31.079 cw(c91.424,-32.182) 92.984,-32.182 cw(c94.544,-32.182) P4.19@93.441,-31.079 ; P4.19@92.984,-30.622 92.984,-34.945 95.484,-37.445 P4.20@95.484,-42.022 ; U16.16@93.726,4.432 v1(93.726,6.223) ; P4.20@95.027,-41.565 ccw(c93.924,-40.462) 95.484,-40.462 ccw(c97.044,-40.462) P4.20@95.941,-41.565 ; U16.14@96.266,4.432 v1(96.266,6.223) ; U16.12@98.806,4.432 v1(98.806,6.223) ; U16.10@101.346,4.432 v1(101.346,6.223) ; v1(109.22,6.985) 109.22,5.969 109.728,5.461 116.149,5.461 P2.20@116.53,5.08 ; 114.413,5.461 cw(c114.413,2.963) P2.20@116.179,4.729 ; 115.639,5.461 cw(c115.639,4.189) P2.20@116.538,5.088
  Bottom Layer w0.508: P5.7@1.917,38.481 cw(c0.72,38.481) 1.566,37.634 cw(c2.413,36.788) P5.7@2.413,37.985 ; P5.7@2.413,38.481 1.081,37.149 1.081,20.905 6.749,15.237 6.749,12.464 5.153,10.868 2.486,10.868 1.081,9.463 1.081,-22.579 J1.7@6.401,-27.899 ; v1(4.826,-34.417) 5.715,-35.306 12.192,-35.306 12.201,-35.297 13.393,-35.297 14.781,-33.909 20.955,-33.909 22.606,-32.258 24.13,-32.258 25.527,-33.655 27.94,-33.655 29.21,-34.925 32.74,-34.925 34.01,-33.655 36.765,-33.655 38.035,-32.385 v1(41.783,-32.385) ; J1.7@5.81,-27.899 ccw(c4.383,-27.899) 5.392,-26.89 ccw(c6.401,-25.881) J1.7@6.401,-27.308 ; v1(50.292,6.223) v1(55.372,6.223) v1(57.912,6.223) v1(71.882,6.223) v1(74.422,6.223) v1(76.962,6.223) v1(79.502,6.223) v1(93.726,6.223) v1(96.266,6.223) v1(98.806,6.223) v1(101.346,6.223) 106.68,6.223 107.442,6.985 v1(109.22,6.985) ; v1(60.198,-38.354) 68.956,-38.354 P4.8@72.624,-42.022 74.763,-39.883 93.345,-39.883 P4.20@95.484,-42.022 97.501,-40.005 104.897,-40.005 P4.26@106.914,-42.022 ; P4.8@71.978,-42.022 ccw(c70.418,-42.022) 71.521,-40.919 ccw(c72.624,-39.816) 72.624,-41.376 ccw(c72.624,-39.816) 73.727,-40.919 ccw(c74.83,-42.022) P4.8@73.27,-42.022 ; P4.13@81.554,-30.622 82.966,-29.21 91.572,-29.21 P4.19@92.984,-30.622 94.396,-29.21 103.002,-29.21 P4.25@104.414,-30.622 105.826,-29.21 114.432,-29.21 P4.31@115.844,-30.622 ; P4.13@81.554,-29.976 ccw(c81.554,-28.416) 82.657,-29.519 ccw(c83.76,-30.622) P4.13@82.2,-30.622 ; P4.19@92.338,-30.622 ccw(c90.778,-30.622) 91.881,-29.519 ccw(c92.984,-28.416) 92.984,-29.976 ccw(c92.984,-28.416) 94.087,-29.519 ccw(c95.19,-30.622) P4.19@93.63,-30.622 ; P4.20@94.838,-42.022 ccw(c93.278,-42.022) 94.381,-40.919 ccw(c95.484,-39.816) 95.484,-41.376 ccw(c95.484,-39.816) 96.587,-40.919 ccw(c97.69,-42.022) P4.20@96.13,-42.022 ; P4.25@103.768,-30.622 ccw(c102.208,-30.622) 103.311,-29.519 ccw(c104.414,-28.416) 104.414,-29.976 ccw(c104.414,-28.416) 105.517,-29.519 ccw(c106.62,-30.622) P4.25@105.06,-30.622 ; P4.26@106.268,-42.022 ccw(c104.708,-42.022) 105.811,-40.919 ccw(c106.914,-39.816) P4.26@106.914,-41.376 ; P4.31@115.198,-30.622 ccw(c113.638,-30.622) 114.741,-29.519 ccw(c115.844,-28.416) P4.31@115.844,-29.976
A(PIN8-): J1.8 U4.13 | length 27.2
  Top Layer w0.508: U4.13@3.07,-5.207 5.207,-5.207 5.715,-5.715 5.715,-9.017 2.794,-11.938 2.794,-17.907 4.699,-19.812 4.699,-23.399 J1.8@6.401,-25.101 ; J1.8@5.81,-25.101 ccw(c4.383,-25.101) 5.392,-24.092 ccw(c6.401,-23.083) J1.8@6.401,-24.51
AB0: U2.8 U3.44 | length 28.2
  Top Layer w0.254: U2.8@20.078,22.238 23.355,22.238 23.622,21.971 v1(24.13,21.971) ; v1@24.008,21.849 ccw(c23.712,21.553) 23.712,21.971 ccw(c23.712,22.389) v1@24.008,22.093 ; v1@29.342,11.054 cw(c29.046,10.758) 29.464,10.758 cw(c29.882,10.758) v1@29.586,11.054 ; v1(29.464,11.176) 29.464,10.16 31.623,8.001 31.623,6.35 31.369,6.096 U3.44@30.607,6.096 ; U3.44@31.297,6.159 ccw(c31.297,6.485) 31.527,6.254 ; U3.44@31.424,6.032 cw(c31.711,6.032) 31.508,6.235
  Bottom Layer w0.254: v1(24.13,21.971) 25.908,21.971 29.464,18.415 v1(29.464,11.176) ; v1@24.252,21.849 cw(c24.548,21.553) 24.548,21.971 cw(c24.548,22.389) v1@24.252,22.093 ; v1@29.342,11.298 ccw(c29.046,11.594) 29.464,11.594 ccw(c29.882,11.594) v1@29.586,11.298
AB1: U2.9 U3.43 | length 30.6
  Top Layer w0.254: U2.9@20.078,22.738 20.101,22.715 21.176,22.715 ; U2.9@20.99,22.719 cw(c21.077,22.571) 21.199,22.692 ; U2.9@20.993,22.721 cw(c21.081,22.621) 21.176,22.715 ; v1@24.897,22.57 ccw(c24.601,22.275) 24.601,22.692 ccw(c24.601,23.11) v1@24.897,22.815 ; v1(25.019,22.692) 21.199,22.692 ; v1@29.977,11.943 cw(c29.681,11.647) 30.099,11.647 cw(c30.517,11.647) v1@30.221,11.943 ; v1(30.099,12.065) 30.099,10.167 32.077,8.189 32.077,5.534 31.75,5.207 U3.43@30.48,5.207 ; U3.43@31.387,5.322 ccw(c31.664,5.599) 31.664,5.207 ; 21.176,22.715 21.199,22.692
  Bottom Layer w0.254: v1(25.019,22.692) 25.829,22.692 30.099,18.422 v1(30.099,12.065) ; v1@25.141,22.57 cw(c25.437,22.275) 25.437,22.692 cw(c25.437,23.11) v1@25.141,22.815 ; v1@29.977,12.187 ccw(c29.681,12.483) 30.099,12.483 ccw(c30.517,12.483) v1@30.221,12.187
AB2: U2.10 U3.41 | length 34.5
  Top Layer w0.254: U2.10@20.078,23.238 23.746,23.238 24.511,24.003 v1@25.788,24.003 ; v1@25.659,23.881 ccw(c25.363,23.585) 25.363,24.003 ccw(c25.363,24.421) v1@25.659,24.125 ; U3.41@30.426,3.632 32.08,3.632 32.985,4.537 32.985,8.565 31.496,10.054 v1(31.496,12.065) ; v1@31.374,11.943 cw(c31.078,11.647) 31.496,11.647 cw(c31.914,11.647) v1@31.618,11.943 ; U3.41@31.387,3.542 cw(c31.604,3.325) 31.604,3.632 cw(c31.604,3.939) U3.41@31.387,3.722
  Bottom Layer w0.254: v1@25.781,23.83 cw(c25.781,23.361) 26.112,23.693 ; v1(25.781,24.003) 25.802,24.003 31.496,18.309 v1(31.496,12.065) ; v1@25.954,24.003 ccw(c26.321,24.003) 26.061,23.744 ; v1@31.374,12.187 ccw(c31.078,12.483) 31.496,12.483 ccw(c31.914,12.483) v1@31.618,12.187
AB3: U2.11 U3.40 | length 38.2
  Top Layer w0.254: U2.11@19.697,23.738 23.223,23.738 23.242,23.757 23.247,23.757 23.614,24.124 23.614,24.129 24.25,24.765 v1(24.892,24.765) ; v1@24.77,24.643 ccw(c24.474,24.347) 24.474,24.765 ccw(c24.474,25.183) v1@24.77,24.887 ; U3.40@30.426,2.832 32.169,2.832 33.439,4.102 33.439,8.753 32.131,10.061 v1(32.131,11.176) ; U3.40@31.387,2.742 cw(c31.604,2.525) 31.604,2.832 cw(c31.604,3.139) U3.40@31.387,2.922 ; v1@32.009,11.054 cw(c31.713,10.758) 32.131,10.758 cw(c32.549,10.758) v1@32.253,11.054
  Bottom Layer w0.254: v1(24.892,24.765) 27.813,24.765 28.448,24.13 28.448,21.999 32.135,18.313 32.131,18.309 v1(32.131,11.176) ; v1@25.014,24.643 cw(c25.31,24.347) 25.31,24.765 cw(c25.31,25.183) v1@25.014,24.887 ; v1@32.009,11.298 ccw(c31.713,11.594) 32.131,11.594 ccw(c32.549,11.594) v1@32.253,11.298
AB4: U2.24 U3.37 | length 53.8
  Top Layer w0.254: U2.24@14.728,28.088 14.728,29.596 14.774,29.642 14.774,29.654 15.24,30.12 v1(15.24,30.87) ; v1@15.118,30.748 cw(c14.822,30.453) 15.24,30.453 cw(c15.658,30.453) v1@15.362,30.748 ; U3.37@30.426,0.432 33.325,0.432 33.893,1 33.893,8.941 32.766,10.068 v1(32.766,12.065) ; U3.37@31.387,0.342 cw(c31.604,0.125) 31.604,0.432 cw(c31.604,0.739) U3.37@31.387,0.522 ; v1@32.644,11.943 cw(c32.348,11.647) 32.766,11.647 cw(c33.184,11.647) v1@32.888,11.943
  Bottom Layer w0.254: v1(15.24,30.87) 16.639,30.87 16.884,31.115 18.676,31.115 19.45,30.341 19.45,27.159 21.066,25.543 28.016,25.543 28.975,24.584 28.975,22.738 28.972,22.735 28.972,22.174 32.766,18.38 v1(32.766,12.065) ; v1@15.362,30.748 cw(c15.658,30.453) 15.658,30.87 cw(c15.658,31.288) v1@15.362,30.993 ; v1@32.644,12.187 ccw(c32.348,12.483) 32.766,12.483 ccw(c33.184,12.483) v1@32.888,12.187
AB5: U2.25 U3.42 | length 45.3
  Top Layer w0.254: v1@14.102,30.05 cw(c13.797,29.745) 14.228,29.745 ; U2.25@14.228,28.088 v1@14.228,30.235 ; 14.228,29.764 cw(c14.632,29.764) v1@14.346,30.05 ; U3.42@30.48,4.445 32.004,4.445 32.531,4.972 32.531,8.377 30.734,10.174 v1(30.734,11.176) ; v1@30.612,11.054 cw(c30.316,10.758) 30.734,10.758 cw(c31.152,10.758) v1@30.856,11.054 ; U3.42@31.387,4.342 cw(c31.635,4.094) 31.635,4.445 ; U3.42@31.387,4.522 ccw(c31.572,4.707) 31.572,4.445
  Bottom Layer w0.254: v1(14.224,30.172) 14.224,30.235 16.646,30.235 17.018,30.607 18.542,30.607 18.996,30.153 18.996,26.851 20.758,25.089 23.171,25.089 24.941,23.319 25.844,23.319 30.734,18.429 v1(30.734,11.176) ; v1@14.346,30.05 cw(c14.795,29.601) 14.795,30.235 ; v1@30.612,11.298 ccw(c30.316,11.594) 30.734,11.594 ccw(c31.152,11.594) v1@30.856,11.298
AB6: U2.37 U3.32 | length 81.4
  Top Layer w0.254: v1@8.641,28.643 cw(c8.345,28.348) 8.763,28.348 cw(c9.181,28.348) v1@8.885,28.643 ; v1(8.763,28.765) 8.763,28.321 7.866,27.424 5.328,27.424 4.934,27.03 4.934,24.149 5.207,23.876 6.858,23.876 7.22,24.238 U2.37@8.878,24.238 ; U3.32@26.986,-5.479 cw(c26.769,-5.696) 27.076,-5.696 cw(c27.383,-5.696) U3.32@27.166,-5.479 ; U3.32@27.076,-4.137 27.076,-5.994 27.432,-6.35 28.046,-6.35 34.801,0.405 34.801,9.317 34.036,10.082 v1(34.036,12.065) ; v1@33.914,11.943 cw(c33.618,11.647) 34.036,11.647 cw(c34.454,11.647) v1@34.158,11.943
  Bottom Layer w0.254: v1@8.763,28.829 9.144,29.21 9.652,29.21 12.574,32.132 18.943,32.132 20.358,30.717 20.358,27.655 21.562,26.451 28.392,26.451 29.883,24.96 29.883,22.547 34.036,18.394 v1(34.036,12.065) ; v1@8.763,28.938 ccw(c8.763,29.203) 8.95,29.016 ; v1@8.936,28.765 cw(c9.507,28.765) 9.103,29.169 ; v1@33.914,12.187 ccw(c33.618,12.483) 34.036,12.483 ccw(c34.454,12.483) v1@34.158,12.187
AB7: U2.38 U3.31 | length 85.3
  Top Layer w0.254: v1@8.59,29.845 cw(c8.172,29.845) 8.468,29.55 cw(c8.763,29.254) v1@8.763,29.672 ; v1(8.763,29.845) 8.128,29.21 8.128,28.448 7.62,27.94 5.202,27.94 4.48,27.218 4.48,23.961 5.019,23.422 7.046,23.422 7.362,23.738 U2.38@8.878,23.738 ; U3.31@26.186,-5.479 cw(c25.938,-5.727) 26.289,-5.727 ; 26.289,-5.664 cw(c26.551,-5.664) U3.31@26.366,-5.479 ; U3.31@26.289,-4.518 26.289,-6.223 26.924,-6.858 28.18,-6.858 35.255,0.217 35.255,9.505 34.671,10.089 v1(34.671,11.176) ; v1@34.549,11.054 cw(c34.253,10.758) 34.671,10.758 cw(c35.089,10.758) v1@34.793,11.054
  Bottom Layer w0.254: v1(8.763,29.845) 9.645,29.845 12.386,32.586 19.131,32.586 20.812,30.905 20.812,27.843 21.75,26.905 28.58,26.905 30.337,25.148 30.337,22.735 34.671,18.401 v1(34.671,11.176) ; v1@8.885,29.723 cw(c9.181,29.427) 9.181,29.845 cw(c9.181,30.263) v1@8.885,29.967 ; v1@34.549,11.298 ccw(c34.253,11.594) 34.671,11.594 ccw(c35.089,11.594) v1@34.793,11.298
AB8: U2.39 U3.29 | length 90.6
  Top Layer w0.254: v1@5.542,29.718 cw(c5.124,29.718) 5.42,29.423 cw(c5.715,29.127) v1@5.715,29.545 ; v1(5.715,29.718) 4.026,28.029 4.026,23.773 4.831,22.968 7.234,22.968 7.505,23.238 U2.39@8.878,23.238 ; U3.29@24.586,-5.479 cw(c24.369,-5.696) 24.676,-5.696 cw(c24.983,-5.696) U3.29@24.766,-5.479 ; U3.29@24.676,-4.518 24.676,-7.023 25.1,-7.447 28.233,-7.447 35.709,0.029 35.709,9.693 35.306,10.096 v1(35.306,12.065) ; v1@35.184,11.943 cw(c34.888,11.647) 35.306,11.647 cw(c35.724,11.647) v1@35.428,11.943
  Bottom Layer w0.254: v1(5.715,29.718) 7.493,29.718 8.255,30.48 9.638,30.48 12.198,33.04 19.319,33.04 21.266,31.093 21.266,28.031 21.938,27.359 28.768,27.359 30.791,25.336 30.791,22.923 35.306,18.408 v1(35.306,12.065) ; v1@5.837,29.596 cw(c6.133,29.3) 6.133,29.718 cw(c6.133,30.136) v1@5.837,29.84 ; v1@35.184,12.187 ccw(c34.888,12.483) 35.306,12.483 ccw(c35.724,12.483) v1@35.428,12.187
AB9: U2.40 U3.25 | length 99.5
  Top Layer w0.254: 8.325,30.55 cw(c9.271,29.605) v1@9.271,30.942 ; 8.759,30.984 cw(c9.271,30.472) v1@9.271,31.196 ; U2.40@8.878,22.738 7.647,22.738 7.422,22.514 4.643,22.514 3.429,23.728 3.429,28.319 5.455,30.345 5.975,30.345 6.421,29.899 7.674,29.899 8.89,31.115 ; v1@9.141,31.001 ccw(c8.89,30.782) 8.89,31.115 ; v1@9.141,31.229 cw(c8.89,31.448) 8.89,31.115 ; v1(9.271,31.115) 8.89,31.115 ; U3.25@21.386,-5.479 cw(c21.169,-5.696) 21.476,-5.696 cw(c21.783,-5.696) U3.25@21.566,-5.479 ; U3.25@21.476,-4.518 21.476,-7.633 21.836,-7.993 28.329,-7.993 36.163,-0.159 36.163,9.882 35.941,10.104 v1(35.941,11.049) ; v1@35.819,10.927 cw(c35.523,10.631) 35.941,10.631 cw(c36.359,10.631) v1@36.063,10.927
  Bottom Layer w0.254: v1(9.271,31.115) 9.631,31.115 ; v1@9.406,31.007 cw(c9.631,30.827) 9.631,31.115 ; v1@9.406,31.223 ccw(c9.631,31.403) 9.631,31.115 ; v1@35.819,11.171 ccw(c35.523,11.467) 35.941,11.467 ccw(c36.359,11.467) v1@36.063,11.171 ; v1(35.941,11.049) 35.941,18.415 31.245,23.111 31.245,25.524 28.956,27.813 22.126,27.813 21.72,28.219 21.72,31.281 19.507,33.494 12.01,33.494 9.631,31.115
AB10: U2.51 U3.10 | length 28.8
  Top Layer w0.254: v1@10.749,5.334 ccw(c10.331,5.334) 10.627,5.629 ccw(c10.922,5.925) v1@10.922,5.507 ; v1(10.922,5.334) 10.23,6.026 10.23,12.128 11.728,13.626 U2.51@11.728,17.189 ; v1@20.554,5.837 ccw(c20.258,6.133) 20.676,6.133 ccw(c21.094,6.133) v1@20.798,5.837 ; U3.10@20.586,7.621 cw(c20.369,7.404) 20.676,7.404 cw(c20.983,7.404) U3.10@20.766,7.621 ; v1@20.676,5.588 U3.10@20.676,8.582
  Bottom Layer w0.254: v1(10.922,5.334) 20.295,5.334 v1(20.676,5.715) ; v1@11.044,5.212 cw(c11.34,4.916) 11.34,5.334 cw(c11.34,5.752) v1@11.044,5.456 ; v1@20.503,5.715 cw(c20.085,5.715) 20.381,5.42 cw(c20.676,5.124) v1@20.676,5.542
ADC12_PORT: P1.4 P4.9 | length 70.1
  Top Layer w0.508: P1.4@37.33,-10.656 cw(c37.33,-11.853) 38.177,-11.007 cw(c39.023,-10.16) P1.4@37.826,-10.16 ; P1.4@37.33,-10.16 38.608,-11.438 38.608,-14.097 39.751,-15.24 39.751,-27.494 42.799,-30.542 42.799,-36.13 43.626,-36.957 73.406,-36.957 73.934,-36.429 P4.9@73.934,-30.622 ; P4.9@73.477,-31.079 cw(c72.374,-32.182) 73.934,-32.182 cw(c75.494,-32.182) P4.9@74.391,-31.079
ADC13_PORT: P1.3 P4.3 | length 56.3
  Top Layer w0.508: P1.3@39.87,-10.16 39.87,-10.558 41.074,-11.762 41.074,-13.904 40.513,-14.465 40.513,-27.178 43.561,-30.226 43.561,-35.814 43.942,-36.195 61.976,-36.195 62.504,-35.667 P4.3@62.504,-30.622 P4.3@62.611,-30.729 ; P1.3@40.366,-10.16 ccw(c42.524,-10.16) 40.998,-11.686 ; P4.3@62.047,-31.079 cw(c60.944,-32.182) 62.504,-32.182 cw(c64.064,-32.182) P4.3@62.961,-31.079
AGND: C10.2 C11.2 C12.2 C13.2 C14.2 C17.2 LR17.1 U6.5 U6.6 U6.46 | length 72.9
  Top Layer w0.25: C11.2@17.714,-24.511 C11.2@18.319,-23.907
  Top Layer w0.254: U6.46@21.248,-16.863 v1(22.832,-16.863) ; v1@22.71,-16.985 ccw(c22.414,-17.281) 22.414,-16.863 ccw(c22.414,-16.445) v1@22.71,-16.741 ; U6.5@24.523,-19.138 24.523,-20.713 24.638,-20.828 v1(25.146,-20.828) ; v1@25.023,-20.705 U6.6@25.023,-19.138 ; 25.023,-20.113 ccw(c25.861,-20.113) v1@25.268,-20.706 ; v1@25.024,-20.95 ccw(c24.728,-21.246) 24.728,-20.828 ccw(c24.728,-20.41) v1@25.024,-20.706
  Top Layer w0.5: C11.2@17.489,-24.392 ccw(c16.891,-24.481) v1(16.891,-23.876) 18.288,-23.876 C11.2@18.319,-23.907 ; C10.2@31.623,-24.191 31.938,-23.876 v1(32.766,-23.876) ccw(c32.766,-24.481) C10.2@32.168,-24.392
  Bottom Layer w0.5: v1(16.891,-23.876) 17.78,-23.876 18.034,-23.622 18.034,-22.733 ; LR17.1@20.411,-20.304 ccw(c20.411,-19.484) LR17.1@21.133,-19.872 ; LR17.1@20.693,-19.635 cw(c19.574,-19.034) 19.574,-20.304 ; LR17.1@21.686,-19.687 ccw(c22.606,-19.31) 22.606,-20.304 19.574,-20.304 ; v1@22.86,-17.068 22.86,-20.193 22.749,-20.304 ; 23.708,-20.304 ccw(c23.708,-18.998) C13.2@24.778,-19.746 ; 23.76,-20.304 cw(c23.76,-22.214) v1@25.111,-20.863 ; C13.2@24.369,-19.46 cw(c22.749,-18.329) 22.749,-20.304 ; C13.2@24.7,-20.213 cw(c24.453,-20.861) v1@25.146,-20.861 ; C13.2@24.878,-19.746 ccw(c26.226,-18.399) 26.226,-20.304 ; v1(25.146,-20.828) C13.2@25.146,-20.304 ; v1@25.181,-20.863 cw(c26.532,-22.214) 26.532,-20.304 ; C13.2@25.232,-19.392 ccw(c27.433,-17.192) 27.433,-20.304 ; 25.876,-20.304 ccw(c25.876,-17.192) C12.2@28.076,-19.392 ; 27.083,-20.304 ccw(c27.083,-18.399) C12.2@28.43,-19.746 ; C12.2@28.48,-19.746 27.922,-20.304 C13.2@25.146,-20.304 ; 28.884,-23.876 cw(c28.884,-25.742) C17.2@30.203,-24.423 ; C17.2@29.816,-23.876 ccw(c29.816,-23.328) C17.2@30.203,-23.715 ; C17.2@31.011,-24.423 cw(c32.33,-25.742) 32.33,-23.876 ; C17.2@31.011,-23.715 ccw(c31.398,-23.328) C17.2@31.398,-23.876 ; v1@32.766,-23.96 cw(c33.867,-23.96) C14.2@33.449,-22.942 ; C14.2@32.766,-23.214 cw(c33.561,-23.214) C14.2@33.259,-22.479 ; C14.2@34.163,-22.52 32.766,-22.52 v1(32.766,-23.876) 24.384,-23.876 23.241,-22.733 18.034,-22.733 ; 18.034,-22.733 18.034,-21.844 19.574,-20.304 ; 22.749,-20.304 C13.2@25.146,-20.304
B(PIN3+): J1.3 U4.12 | length 31.3
  Top Layer w0.508: U4.12@3.07,-3.937 5.842,-3.937 6.477,-4.572 6.477,-9.525 3.683,-12.319 3.683,-16.891 7.747,-20.955 7.747,-25.048 J1.3@9.199,-26.5 ; J1.3@8.608,-26.5 ccw(c7.181,-26.5) 8.19,-25.491 ccw(c9.199,-24.482) J1.3@9.199,-25.909
CAN1_RX: C29.2 P1.20 R103.2 | length 47.5
  Top Layer w0.254: P1.20@37.33,9.537 cw(c37.33,8.033) 38.394,9.096 cw(c39.457,10.16) P1.20@37.953,10.16 ; P1.20@37.33,9.791 cw(c37.33,8.9) 37.96,9.53 cw(c38.59,10.16) P1.20@37.699,10.16 ; P1.20@37.33,10.16 38.608,8.882 40.14,8.882 41.148,7.874 41.148,-8.89 41.983,-9.725 v1(42.037,-9.725) ; 41.649,-9.391 ccw(c42.037,-9.004) v1@42.037,-9.552 ; 41.78,-9.522 cw(c41.577,-9.725) v1@41.864,-9.725
  Bottom Layer w0.254: v1@41.91,-9.725 48.333,-9.725 49.215,-10.607 49.53,-10.607 49.58,-10.557 R103.2@52.545,-10.557 ; v1@42.159,-9.847 cw(c42.455,-10.143) 42.455,-9.725 cw(c42.455,-9.307) v1@42.159,-9.603 ; C29.2@48.504,-10.421 ccw(c47.843,-10.215) 48.333,-9.725 ccw(c48.971,-9.087) C29.2@49.047,-9.986 ; C29.2@49.46,-10.868 cw(c50.211,-11.619) 50.211,-10.557 ; C29.2@49.46,-10.346 ccw(c49.969,-9.837) 49.969,-10.557 ; C29.2@49.64,-11.048 cw(c50.824,-12.232) 50.824,-10.557 ; C29.2@49.64,-10.166 ccw(c50.582,-9.224) 50.582,-10.557 ; R103.2@51.615,-10.962 ccw(c50.637,-11.94) 50.637,-10.557 ccw(c50.637,-9.174) R103.2@51.615,-10.152 ; R103.2@51.794,-10.783 ccw(c51.25,-11.327) 51.25,-10.557 ccw(c51.25,-9.787) R103.2@51.794,-10.331
CAN1_TX: C30.2 P1.19 R104.2 | length 52.9
  Top Layer w0.254: P1.19@39.87,9.537 cw(c39.87,8.033) 40.934,9.096 cw(c41.997,10.16) P1.19@40.493,10.16 ; P1.19@39.87,9.791 cw(c39.87,8.9) 40.5,9.53 cw(c41.13,10.16) P1.19@40.239,10.16 ; P1.19@39.878,10.16 P1.19@39.87,10.16 41.583,8.447 41.583,8.081 41.602,8.062 41.602,-7.947 v1(42.291,-8.636) ; v1@42.118,-8.636 ccw(c41.7,-8.636) 41.996,-8.341 ccw(c42.291,-8.045) v1@42.291,-8.463
  Bottom Layer w0.254: v1@42.291,-8.809 cw(c42.291,-9.227) 42.586,-8.931 cw(c42.882,-8.636) v1@42.464,-8.636 ; v1(42.291,-8.636) 42.926,-9.271 52.959,-9.271 ; 53.368,-9.68 ccw(c54.719,-8.33) C30.2@54.799,-10.238 ; 53.778,-10.09 ccw(c54.752,-9.116) C30.2@54.809,-10.492 ; C30.2@54.788,-9.985 cw(c54.687,-7.544) 52.959,-9.271 ; C30.2@55.175,-10.868 cw(c55.926,-11.619) 55.926,-10.557 ; C30.2@55.175,-10.346 ccw(c55.684,-9.837) 55.684,-10.557 ; C30.2@55.355,-11.048 cw(c56.539,-12.232) 56.539,-10.557 ; C30.2@55.355,-10.166 ccw(c56.297,-9.224) 56.297,-10.557 ; R104.2@57.203,-10.962 ccw(c56.225,-11.94) 56.225,-10.557 ccw(c56.225,-9.174) R104.2@57.203,-10.152 ; R104.2@57.382,-10.783 ccw(c56.838,-11.327) 56.838,-10.557 ccw(c56.838,-9.787) R104.2@57.382,-10.331 ; R104.2@57.658,-10.557 54.245,-10.557 52.959,-9.271
CANH_PORT: D33.2 J2.1 P4.4 R121.1 | length 52.6
  Top Layer w0.508: J2.1@47.498,-41.148 50.038,-41.148 51.689,-39.497 62.479,-39.497 P4.4@65.004,-42.022 ; J2.1@47.743,-41.393 cw(c48.333,-41.983) 48.333,-41.148 cw(c48.333,-40.313) J2.1@47.743,-40.903 ; P4.4@64.358,-42.022 ccw(c62.798,-42.022) 63.901,-40.919 ccw(c65.004,-39.816) P4.4@65.004,-41.376
  Bottom Layer w0.508: J2.1@47.253,-40.903 ccw(c46.663,-40.313) 47.498,-40.313 ccw(c48.333,-40.313) J2.1@47.743,-40.903 ; J2.1@47.498,-41.249 cw(c51.299,-41.249) D33.2@48.913,-38.29 ; J2.1@47.498,-41.148 47.498,-38.445 D33.2@48.351,-37.592 48.351,-34.945 ; 47.498,-40.187 cw(c50.443,-40.187) D33.2@48.595,-37.894 ; 47.498,-39.124 cw(c49.587,-39.124) D33.2@48.276,-37.499 ; D33.2@47.717,-36.958 ccw(c46.188,-35.429) 48.351,-35.429 ccw(c50.514,-35.429) D33.2@48.985,-36.958 ; D33.2@47.903,-36.816 ccw(c47.07,-35.373) 48.679,-35.804 ; D33.2@48.351,-37.03 cw(c51.982,-37.03) R121.1@49.414,-34.462 ; 48.351,-35.803 cw(c50.755,-35.803) R121.1@49.055,-34.103 ; 48.423,-34.873 cw(c49.099,-35.549) R121.1@49.099,-34.593 ; R121.1@48.653,-34.167 cw(c47.619,-34.212) 48.351,-34.945 ; 48.772,-35.458 ccw(c50.594,-35.946) D33.2@49.073,-37.062 ; R121.1@49.149,-34.147 48.351,-34.945
CANL_PORT: D34.2 P4.6 R110.2 R122.1 | length 44.4
  Bottom Layer w0.508: R110.2@50.12,-40.783 ccw(c49.358,-40.021) 50.435,-40.021 ccw(c51.512,-40.021) R110.2@50.75,-40.783 ; R110.2@50.435,-41.148 50.435,-39.735 52.197,-37.973 R122.1@52.197,-34.274 ; 50.933,-39.237 cw(c52.741,-41.045) 52.741,-38.488 cw(c52.741,-40.651) 54.271,-39.122 cw(c55.8,-37.592) D34.2@53.637,-37.592 ; 51.327,-38.843 ccw(c50.075,-37.592) D34.2@51.845,-37.592 ; D34.2@51.8,-38.37 cw(c52.741,-39.31) D34.2@52.741,-37.98 ; R122.1@51.805,-34.462 cw(c50.857,-35.41) 52.197,-35.41 ; R122.1@52.07,-34.147 R122.1@52.197,-34.274 ; 52.197,-35.445 ccw(c54.749,-35.445) D34.2@53.006,-37.309 ; 52.197,-35.038 cw(c53.011,-35.038) R122.1@52.435,-34.462 ; D34.2@52.741,-37.592 54.773,-39.624 66.416,-39.624 P4.6@68.814,-42.022 ; D34.2@53.353,-36.938 cw(c55.843,-34.274) R122.1@52.197,-34.274 ; P4.6@68.168,-42.022 ccw(c66.608,-42.022) 67.711,-40.919 ccw(c68.814,-39.816) P4.6@68.814,-41.376
DB0: U2.61 U3.11 | length 13.3
  Top Layer w0.254: U2.61@16.728,16.637 16.728,15.147 17.78,14.095 v1(17.78,10.541) ; v1@17.658,10.663 ccw(c17.362,10.959) 17.78,10.959 ccw(c18.198,10.959) v1@17.902,10.663 ; v1@19.177,10.368 cw(c19.177,9.95) 19.472,10.246 cw(c19.768,10.541) v1@19.35,10.541 ; v1(19.177,10.541) 19.876,9.842 U3.11@19.876,8.582 ; U3.11@19.786,9.543 ccw(c19.569,9.76) 19.876,9.76 ccw(c20.183,9.76) U3.11@19.966,9.543
  Bottom Layer w0.254: v1(17.78,10.541) v1(19.177,10.541) ; v1@17.902,10.419 cw(c18.198,10.123) 18.198,10.541 cw(c18.198,10.959) v1@17.902,10.663 ; v1@19.055,10.419 ccw(c18.759,10.123) 18.759,10.541 ccw(c18.759,10.959) v1@19.055,10.663
DB1: U2.62 U3.12 | length 12.7
  Top Layer w0.254: U2.62@17.228,16.888 17.228,15.289 18.415,14.102 18.415,9.779 17.98,9.344 17.98,6.169 U3.12@17.907,6.096 ; U3.12@17.98,6.249 ccw(c18.414,6.249) U3.12@18.107,5.942 ; 17.98,6.862 ccw(c19.027,6.862) U3.12@18.287,6.122
DB2: U2.29 U3.15 | length 47.8
  Top Layer w0.254: v1@9.276,27.935 ccw(c8.804,28.407) 9.471,28.407 ; v1(9.398,27.813) 9.471,27.886 9.471,29.554 10.197,30.28 11.766,30.28 12.228,29.818 U2.29@12.228,28.088 ; v1@13.716,7.447 cw(c13.716,7.046) 13.999,7.33 ; v1(13.716,7.62) 13.716,7.613 14.278,7.051 14.278,5.449 16.095,3.632 U3.15@17.326,3.632 ; v1@13.889,7.62 ccw(c14.324,7.62) 14.016,7.313 ; 15.624,4.103 ccw(c16.455,4.934) U3.15@16.455,3.759 ; 16.058,3.67 ccw(c16.455,4.067) U3.15@16.455,3.505 ; U3.15@16.365,3.542 ccw(c16.148,3.325) 16.148,3.632 ccw(c16.148,3.939) U3.15@16.365,3.722
  Bottom Layer w0.254: v1@9.276,27.691 ccw(c8.98,27.395) 8.98,27.813 ccw(c8.98,28.231) v1@9.276,27.935 ; v1(9.398,27.813) 6.731,27.813 6.477,28.067 5.08,28.067 3.429,26.416 3.429,23.62 6.845,20.204 7.24,20.204 8.582,18.862 8.582,18.102 10.668,16.016 10.668,10.174 13.222,7.62 v1@13.843,7.62 ; v1@13.594,7.498 ccw(c13.298,7.202) 13.298,7.62 ccw(c13.298,8.038) v1@13.594,7.742